# Altium PCB PCB.PcbDoc (part 2 of 11)
Units mm, origin at the board's own origin, x right, y up, seen from the top; angles counter-clockwise.
Board outline 100.46 x 70.51 mm, 10 copper layers (L1(SIG), L2(GND), L3(PWR), L4(SIG), L5(GND), L6(SIG), L7(GND), L8(SIG), L9(GND), L10(SIG)), stack 1.49 mm thick; 425 components, 324 nets, 2004 pads, 1425 vias.
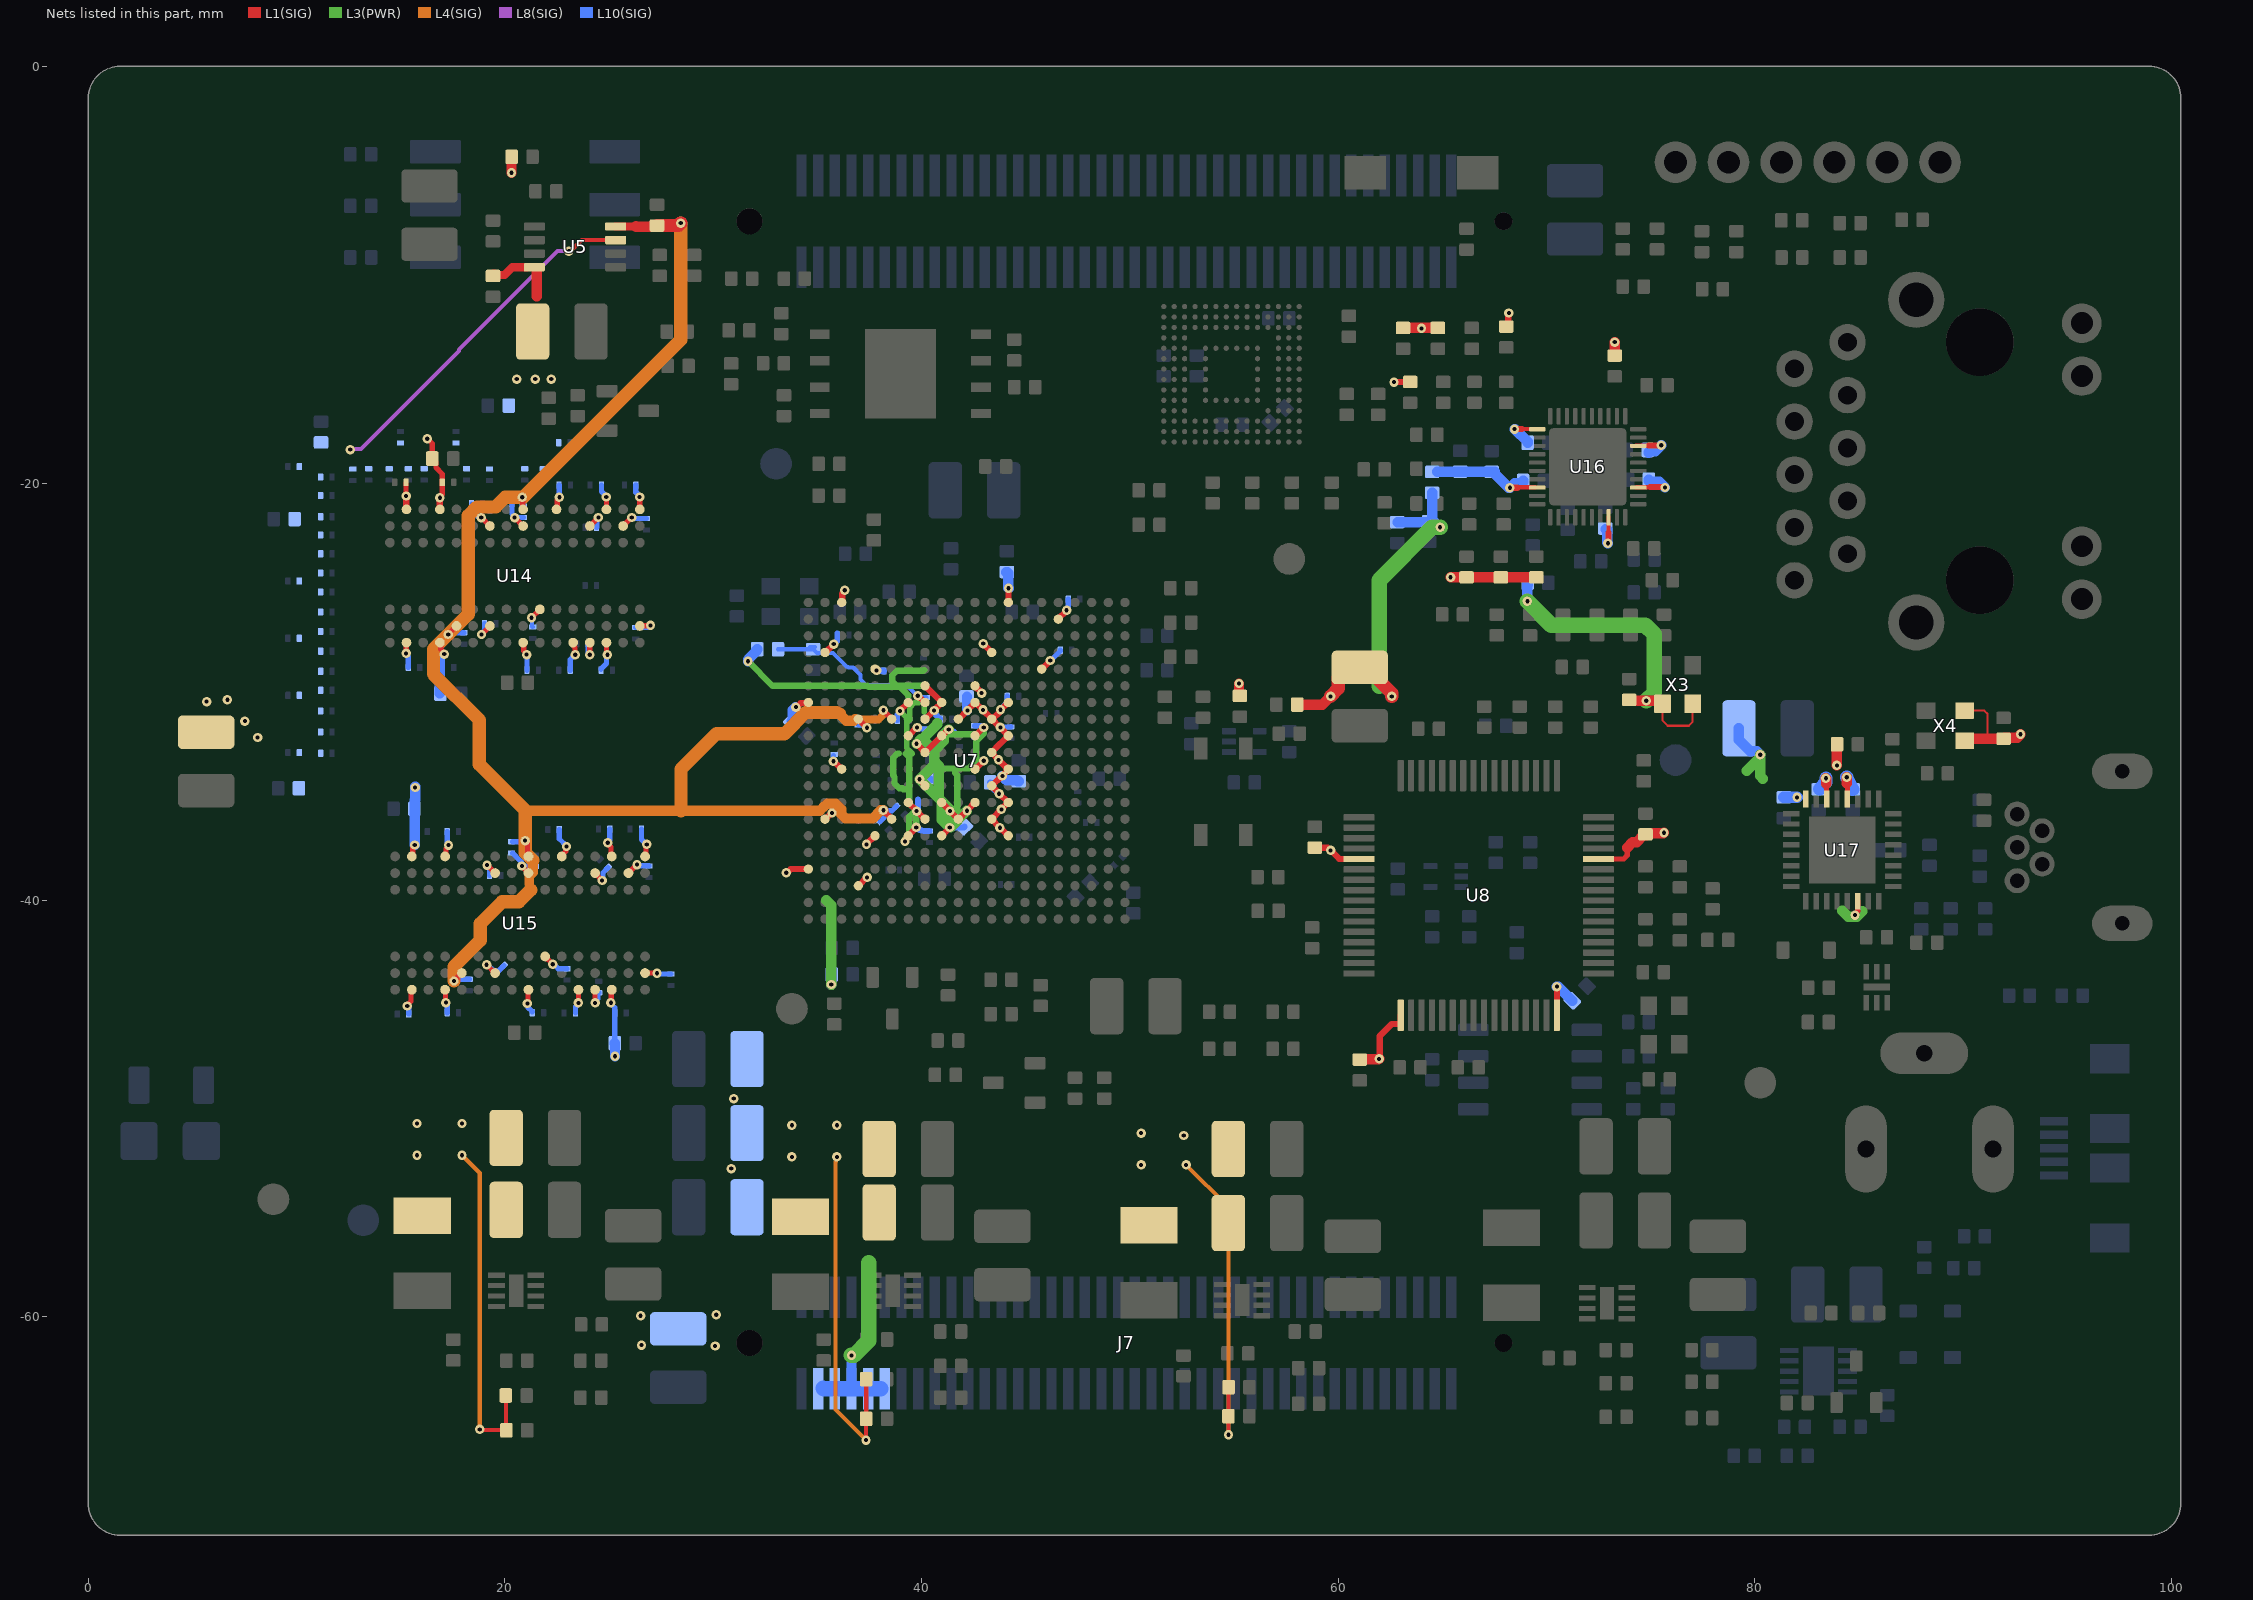
[diagram p10: the nets of this part, all layers, seen from the top]

## Footprints (in the part's own frame and the unit in brackets; to place one, negate y for a bottom-side part, rotate by r counter-clockwise, add the part's x,y. Pads: shape width x height; smd on the part's side, far side on the other; paste and mask are expansions set on the pad) (continued)
BGA400C80P20X20_1700X1700X160N [mm]
  round 0.45 smd: A1(-7.6,7.6) A2(-6.8,7.6) A3(-6,7.6) A4(-5.2,7.6) A5(-4.4,7.6) A6(-3.6,7.6) A7(-2.8,7.6) A8(-2,7.6) A9(-1.2,7.6) A10(-0.4,7.6) A11(0.4,7.6) A12(1.2,7.6) A13(2,7.6) A14(2.8,7.6) A15(3.6,7.6) A16(4.4,7.6) A17(5.2,7.6) A18(6,7.6) A19(6.8,7.6) A20(7.6,7.6) B1(-7.6,6.8) B2(-6.8,6.8) B3(-6,6.8) B4(-5.2,6.8) B5(-4.4,6.8) B6(-3.6,6.8) B7(-2.8,6.8) B8(-2,6.8) B9(-1.2,6.8) B10(-0.4,6.8) B11(0.4,6.8) B12(1.2,6.8) B13(2,6.8) B14(2.8,6.8) B15(3.6,6.8) B16(4.4,6.8) B17(5.2,6.8) B18(6,6.8) B19(6.8,6.8) B20(7.6,6.8) C1(-7.6,6) C2(-6.8,6) C3(-6,6) C4(-5.2,6) C5(-4.4,6) C6(-3.6,6) C7(-2.8,6) C8(-2,6) C9(-1.2,6) C10(-0.4,6) C11(0.4,6) C12(1.2,6) C13(2,6) C14(2.8,6) C15(3.6,6) C16(4.4,6) C17(5.2,6) C18(6,6) C19(6.8,6) C20(7.6,6) D1(-7.6,5.2) D2(-6.8,5.2) D3(-6,5.2) D4(-5.2,5.2) D5(-4.4,5.2) D6(-3.6,5.2) D7(-2.8,5.2) D8(-2,5.2) D9(-1.2,5.2) D10(-0.4,5.2) D11(0.4,5.2) D12(1.2,5.2) D13(2,5.2) D14(2.8,5.2) D15(3.6,5.2) D16(4.4,5.2) D17(5.2,5.2) D18(6,5.2) D19(6.8,5.2) D20(7.6,5.2) E1(-7.6,4.4) E2(-6.8,4.4) E3(-6,4.4) E4(-5.2,4.4) E5(-4.4,4.4) E6(-3.6,4.4) E7(-2.8,4.4) E8(-2,4.4) E9(-1.2,4.4) E10(-0.4,4.4) E11(0.4,4.4) E12(1.2,4.4) E13(2,4.4) E14(2.8,4.4) E15(3.6,4.4) E16(4.4,4.4) E17(5.2,4.4) E18(6,4.4) E19(6.8,4.4) E20(7.6,4.4) F1(-7.6,3.6) F2(-6.8,3.6) F3(-6,3.6) F4(-5.2,3.6) F5(-4.4,3.6) F6(-3.6,3.6) F7(-2.8,3.6) F8(-2,3.6) F9(-1.2,3.6) F10(-0.4,3.6) F11(0.4,3.6) F12(1.2,3.6) F13(2,3.6) F14(2.8,3.6) F15(3.6,3.6) F16(4.4,3.6) F17(5.2,3.6) F18(6,3.6) F19(6.8,3.6) F20(7.6,3.6) G1(-7.6,2.8) G2(-6.8,2.8) G3(-6,2.8) G4(-5.2,2.8) G5(-4.4,2.8) G6(-3.6,2.8) G7(-2.8,2.8) G8(-2,2.8) G9(-1.2,2.8) G10(-0.4,2.8) G11(0.4,2.8) G12(1.2,2.8) G13(2,2.8) G14(2.8,2.8) G15(3.6,2.8) G16(4.4,2.8) G17(5.2,2.8) G18(6,2.8) G19(6.8,2.8) G20(7.6,2.8) H1(-7.6,2) H2(-6.8,2) H3(-6,2) H4(-5.2,2) H5(-4.4,2) H6(-3.6,2) H7(-2.8,2) H8(-2,2) H9(-1.2,2) H10(-0.4,2) H11(0.4,2) H12(1.2,2) H13(2,2) H14(2.8,2) H15(3.6,2) H16(4.4,2) H17(5.2,2) H18(6,2) H19(6.8,2) H20(7.6,2) J1(-7.6,1.2) J2(-6.8,1.2) J3(-6,1.2) J4(-5.2,1.2) J5(-4.4,1.2) J6(-3.6,1.2) J7(-2.8,1.2) J8(-2,1.2) J9(-1.2,1.2) J10(-0.4,1.2) J11(0.4,1.2) J12(1.2,1.2) J13(2,1.2) J14(2.8,1.2) J15(3.6,1.2) J16(4.4,1.2) J17(5.2,1.2) J18(6,1.2) J19(6.8,1.2) J20(7.6,1.2) K1(-7.6,0.4) K2(-6.8,0.4) K3(-6,0.4) K4(-5.2,0.4) K5(-4.4,0.4) K6(-3.6,0.4) K7(-2.8,0.4) K8(-2,0.4) K9(-1.2,0.4) K10(-0.4,0.4) K11(0.4,0.4) K12(1.2,0.4) K13(2,0.4) K14(2.8,0.4) K15(3.6,0.4) K16(4.4,0.4) K17(5.2,0.4) K18(6,0.4) K19(6.8,0.4) K20(7.6,0.4) L1(-7.6,-0.4) L2(-6.8,-0.4) L3(-6,-0.4) L4(-5.2,-0.4) L5(-4.4,-0.4) L6(-3.6,-0.4) L7(-2.8,-0.4) L8(-2,-0.4) L9(-1.2,-0.4) L10(-0.4,-0.4) L11(0.4,-0.4) L12(1.2,-0.4) L13(2,-0.4) L14(2.8,-0.4) L15(3.6,-0.4) L16(4.4,-0.4) L17(5.2,-0.4) L18(6,-0.4) L19(6.8,-0.4) L20(7.6,-0.4) M1(-7.6,-1.2) M2(-6.8,-1.2) M3(-6,-1.2) M4(-5.2,-1.2) M5(-4.4,-1.2) M6(-3.6,-1.2) M7(-2.8,-1.2) M8(-2,-1.2) M9(-1.2,-1.2) M10(-0.4,-1.2) M11(0.4,-1.2) M12(1.2,-1.2) M13(2,-1.2) M14(2.8,-1.2) M15(3.6,-1.2) M16(4.4,-1.2) M17(5.2,-1.2) M18(6,-1.2) M19(6.8,-1.2) M20(7.6,-1.2) N1(-7.6,-2) N2(-6.8,-2) N3(-6,-2) N4(-5.2,-2) N5(-4.4,-2) N6(-3.6,-2) N7(-2.8,-2) N8(-2,-2) N9(-1.2,-2) N10(-0.4,-2) N11(0.4,-2) N12(1.2,-2) N13(2,-2) N14(2.8,-2) N15(3.6,-2) N16(4.4,-2) N17(5.2,-2) N18(6,-2) N19(6.8,-2) N20(7.6,-2) P1(-7.6,-2.8) P2(-6.8,-2.8) P3(-6,-2.8) P4(-5.2,-2.8) P5(-4.4,-2.8) P6(-3.6,-2.8) P7(-2.8,-2.8) P8(-2,-2.8) P9(-1.2,-2.8) P10(-0.4,-2.8) P11(0.4,-2.8) P12(1.2,-2.8) P13(2,-2.8) P14(2.8,-2.8) P15(3.6,-2.8) P16(4.4,-2.8) P17(5.2,-2.8) P18(6,-2.8) P19(6.8,-2.8) P20(7.6,-2.8) R1(-7.6,-3.6) R2(-6.8,-3.6) R3(-6,-3.6) R4(-5.2,-3.6) R5(-4.4,-3.6) R6(-3.6,-3.6) R7(-2.8,-3.6) R8(-2,-3.6) R9(-1.2,-3.6) R10(-0.4,-3.6) R11(0.4,-3.6) R12(1.2,-3.6) R13(2,-3.6) R14(2.8,-3.6) R15(3.6,-3.6) R16(4.4,-3.6) R17(5.2,-3.6) R18(6,-3.6) R19(6.8,-3.6) R20(7.6,-3.6) T1(-7.6,-4.4) T2(-6.8,-4.4) T3(-6,-4.4) T4(-5.2,-4.4) T5(-4.4,-4.4) T6(-3.6,-4.4) T7(-2.8,-4.4) T8(-2,-4.4) T9(-1.2,-4.4) T10(-0.4,-4.4) T11(0.4,-4.4) T12(1.2,-4.4) T13(2,-4.4) T14(2.8,-4.4) T15(3.6,-4.4) T16(4.4,-4.4) T17(5.2,-4.4) T18(6,-4.4) T19(6.8,-4.4) T20(7.6,-4.4) U1(-7.6,-5.2) U2(-6.8,-5.2) U3(-6,-5.2) U4(-5.2,-5.2) U5(-4.4,-5.2) U6(-3.6,-5.2) U7(-2.8,-5.2) U8(-2,-5.2) U9(-1.2,-5.2) U10(-0.4,-5.2) U11(0.4,-5.2) U12(1.2,-5.2) U13(2,-5.2) U14(2.8,-5.2) U15(3.6,-5.2) U16(4.4,-5.2) U17(5.2,-5.2) U18(6,-5.2) U19(6.8,-5.2) U20(7.6,-5.2) V1(-7.6,-6) V2(-6.8,-6) V3(-6,-6) V4(-5.2,-6) V5(-4.4,-6) V6(-3.6,-6) V7(-2.8,-6) V8(-2,-6) V9(-1.2,-6) V10(-0.4,-6) V11(0.4,-6) V12(1.2,-6) V13(2,-6) V14(2.8,-6) V15(3.6,-6) V16(4.4,-6) V17(5.2,-6) V18(6,-6) V19(6.8,-6) V20(7.6,-6) W1(-7.6,-6.8) W2(-6.8,-6.8) W3(-6,-6.8) W4(-5.2,-6.8) W5(-4.4,-6.8) W6(-3.6,-6.8) W7(-2.8,-6.8) W8(-2,-6.8) W9(-1.2,-6.8) W10(-0.4,-6.8) W11(0.4,-6.8) W12(1.2,-6.8) W13(2,-6.8) W14(2.8,-6.8) W15(3.6,-6.8) W16(4.4,-6.8) W17(5.2,-6.8) W18(6,-6.8) W19(6.8,-6.8) W20(7.6,-6.8) Y1(-7.6,-7.6) Y2(-6.8,-7.6) Y3(-6,-7.6) Y4(-5.2,-7.6) Y5(-4.4,-7.6) Y6(-3.6,-7.6) Y7(-2.8,-7.6) Y8(-2,-7.6) Y9(-1.2,-7.6) Y10(-0.4,-7.6) Y11(0.4,-7.6) Y12(1.2,-7.6) Y13(2,-7.6) Y14(2.8,-7.6) Y15(3.6,-7.6) Y16(4.4,-7.6) Y17(5.2,-7.6) Y18(6,-7.6) Y19(6.8,-7.6) Y20(7.6,-7.6)
  silkscreen extent -9.7,-8.5 8.5,8.5, body extent -8.5,-8.5 8.5,8.5, height 1.6
CAP_0201 [mm]
  rrect25% 0.25x0.35 smd mask+0.05: 1(-0.275,0) 2(0.275,0)
  body extent -0.32,-0.17 0.31,0.16, height 0.34
CAP_0402 [mm]
  rrect25% 0.6x0.7 smd: 1(-0.5,0) 2(0.5,0)
  body extent -0.5,-0.26 0.5,0.26, height 0.37
CAP_1206 [mm]
  rrect25% 1x1.8 smd: 1(-1.55,0) 2(1.55,0)
  body extent -1.6,-0.8 1.6,0.8, height 0.94
CAP_1210 [mm]
  rrect25% 1.6x2.7 smd: 1(-1.4,0) 2(1.4,0)
  body extent -1.6,-1.25 1.6,1.25, height 2.5
CON-SOCJ-2155 [mm]
  oval 4.2x2 hole 0.8 slot 3 at 0 deg: 1(0,6.1) 2(0,0)
  oval 2x4.2 hole 0.8 slot 3 at 90 deg: 3(4.6,3.3)
  silkscreen extent -4.75,-7 5,6.98, body extent -4.5,-7.5 4.75,6.6, height 11.11
D_0402 [mm]
  rrect25% 0.6x0.7 smd: A(-0.5,0) K(0.5,0)
  silkscreen extent 0,-0.7 1.2,0.7, body extent -0.5,-0.25 0.5,0.25, height 0.51
DFN2x2-8 [mm]
  rect 0.8x0.25 smd mask+0.15: 1(-0.945,0.75) 2(-0.945,0.25) 3(-0.945,-0.25) 4(-0.945,-0.75) 5(0.945,-0.75) 6(0.945,-0.25) 7(0.945,0.25) 8(0.945,0.75)
  rect 0.69x1.55 smd: 9(0,0)
  silkscreen extent -1.6,1.3 -1.4,1.5, body extent -1.05,-1.05 1.05,1.05, height 0.65
DFN3x3_10L [mm]
  rect 0.9x0.25 smd mask+0.15: 1(-1.395,1) 2(-1.395,0.5) 3(-1.395,0) 4(-1.395,-0.5) 5(-1.395,-1) 6(1.395,-1) 7(1.395,-0.5) 8(1.395,0) 9(1.395,0.5) 10(1.395,1)
  rect 1.49x2.35 smd: 11(0,0)
  silkscreen extent -2.3,-1.7 1.7,1.8, body extent -1.55,-1.55 1.55,1.55, height 0.8
DIGILENT_HS2 [mm]
  round 2 hole 1.1: 1(0,6.35) 2(0,3.81) 3(0,1.27) 4(0,-1.27) 5(0,-3.81) 6(0,-6.35)
  silkscreen extent -1.5,-7.93 1.5,8, body extent -1.2,-7.62 1.21,7.62, height 8.39
DTSM-3 [mm]
  rect 2x1.6 smd: 1(-2.7,0) 2(2.7,0)
  silkscreen extent -1.25,-0.75 1.25,0.75, body extent -3.6,-1.75 3.6,1.75, height 4.96
FB_0402 [mm]
  rrect25% 0.6x0.7 smd: 1(-0.5,0) 2(0.5,0)
  body extent -0.5,-0.25 0.5,0.25, height 0.51
GMSB0522132EU [mm]
  round 1.2 hole 0.7 mask+0.3: 1(-1.6,2.525) 2(-0.8,1.325) 3(0,2.525) 4(0.8,1.325) 5(1.6,2.525)
  oval 1.7x2.9 hole 0.7 slot 1.9 at 90 deg: SH(-3.65,-2.525) SH(3.65,-2.525)
  silkscreen extent -4,-4.97 4,3.6, body extent -3.95,-6.27 3.95,3.13, height 3.91
HR911130A [mm]
  round 1.75 hole 0.9: 1(5.72,-8.89) 2(4.45,-6.35) 3(3.18,-8.89) 4(1.91,-6.35) 5(0.64,-8.89) 6(-0.63,-6.35) 7(-1.9,-8.89) 8(-3.17,-6.35) 9(-4.44,-8.89) 10(-5.71,-6.35)
  round 1.9 hole 1.05: 11(6.625,4.9) 12(4.085,4.9) 13(-4.085,4.9) 14(-6.625,4.9)
  round 3.25 hole 3.25 unplated: MH(-5.715,0) MH(5.715,0)
  round 2.7 hole 1.65: SH(-7.745,-3.05) SH(7.745,-3.05)
  silkscreen extent -8.25,-10.95 8.45,10.75, body extent -7.94,-10.49 7.94,10.91, height 13.51
IND_0402 [mm]
  rrect25% 0.6x0.7 smd: 1(-0.5,0) 2(0.5,0)
  body extent -0.56,-0.26 0.56,0.26, height 0.67
LED_0402_GREEN [mm]
  rrect25% 0.6x0.7 smd: A(-0.5,0) K(0.5,0)
  silkscreen extent -0.15,-0.65 1.1,0.65, body extent -0.51,-0.25 0.51,0.25, height 0.45
LQFP-64-0.5mm [mm] "TSQFP, 64-Leads, Body 10.00x10.00mm, Pitch 0.50mm, IPC Medium Density"
  rrect25% 1.5x0.3 smd mask+0.05: 1(-5.75,3.75) 2(-5.75,3.25) 3(-5.75,2.75) 4(-5.75,2.25) 5(-5.75,1.75) 6(-5.75,1.25) 7(-5.75,0.75) 8(-5.75,0.25) 9(-5.75,-0.25) 10(-5.75,-0.75) 11(-5.75,-1.25) 12(-5.75,-1.75) 13(-5.75,-2.25) 14(-5.75,-2.75) 15(-5.75,-3.25) 16(-5.75,-3.75) 33(5.75,-3.75) 34(5.75,-3.25) 35(5.75,-2.75) 36(5.75,-2.25) 37(5.75,-1.75) 38(5.75,-1.25) 39(5.75,-0.75) 40(5.75,-0.25) 41(5.75,0.25) 42(5.75,0.75) 43(5.75,1.25) 44(5.75,1.75) 45(5.75,2.25) 46(5.75,2.75) 47(5.75,3.25) 48(5.75,3.75)
  rrect25% 0.3x1.5 smd mask+0.05: 17(-3.75,-5.75) 18(-3.25,-5.75) 19(-2.75,-5.75) 20(-2.25,-5.75) 21(-1.75,-5.75) 22(-1.25,-5.75) 23(-0.75,-5.75) 24(-0.25,-5.75) 25(0.25,-5.75) 26(0.75,-5.75) 27(1.25,-5.75) 28(1.75,-5.75) 29(2.25,-5.75) 30(2.75,-5.75) 31(3.25,-5.75) 32(3.75,-5.75) 49(3.75,5.75) 50(3.25,5.75) 51(2.75,5.75) 52(2.25,5.75) 53(1.75,5.75) 54(1.25,5.75) 55(0.75,5.75) 56(0.25,5.75) 57(-0.25,5.75) 58(-0.75,5.75) 59(-1.25,5.75) 60(-1.75,5.75) 61(-2.25,5.75) 62(-2.75,5.75) 63(-3.25,5.75) 64(-3.75,5.75)
  silkscreen extent -5.88,-4 4,4.62, body extent -6,-6 6,6, height 1.6
MICT-TW-96 [mm] "BGA, 96-Balls, Body 8x14mm, Pitch 0.8mm"
  round 0.47 smd mask-0.025: A1(-3.2,6) A2(-2.4,6) A3(-1.6,6) A7(1.6,6) A8(2.4,6) A9(3.2,6) B1(-3.2,5.2) B2(-2.4,5.2) B3(-1.6,5.2) B7(1.6,5.2) B8(2.4,5.2) B9(3.2,5.2) C1(-3.2,4.4) C2(-2.4,4.4) C3(-1.6,4.4) C7(1.6,4.4) C8(2.4,4.4) C9(3.2,4.4) D1(-3.2,3.6) D2(-2.4,3.6) D3(-1.6,3.6) D7(1.6,3.6) D8(2.4,3.6) D9(3.2,3.6) E1(-3.2,2.8) E2(-2.4,2.8) E3(-1.6,2.8) E7(1.6,2.8) E8(2.4,2.8) E9(3.2,2.8) F1(-3.2,2) F2(-2.4,2) F3(-1.6,2) F7(1.6,2) F8(2.4,2) F9(3.2,2) G1(-3.2,1.2) G2(-2.4,1.2) G3(-1.6,1.2) G7(1.6,1.2) G8(2.4,1.2) G9(3.2,1.2) H1(-3.2,0.4) H2(-2.4,0.4) H3(-1.6,0.4) H7(1.6,0.4) H8(2.4,0.4) H9(3.2,0.4) J1(-3.2,-0.4) J2(-2.4,-0.4) J3(-1.6,-0.4) J7(1.6,-0.4) J8(2.4,-0.4) J9(3.2,-0.4) K1(-3.2,-1.2) K2(-2.4,-1.2) K3(-1.6,-1.2) K7(1.6,-1.2) K8(2.4,-1.2) K9(3.2,-1.2) L1(-3.2,-2) L2(-2.4,-2) L3(-1.6,-2) L7(1.6,-2) L8(2.4,-2) L9(3.2,-2) M1(-3.2,-2.8) M2(-2.4,-2.8) M3(-1.6,-2.8) M7(1.6,-2.8) M8(2.4,-2.8) M9(3.2,-2.8) N1(-3.2,-3.6) N2(-2.4,-3.6) N3(-1.6,-3.6) N7(1.6,-3.6) N8(2.4,-3.6) N9(3.2,-3.6) P1(-3.2,-4.4) P2(-2.4,-4.4) P3(-1.6,-4.4) P7(1.6,-4.4) P8(2.4,-4.4) P9(3.2,-4.4) R1(-3.2,-5.2) R2(-2.4,-5.2) R3(-1.6,-5.2) R7(1.6,-5.2) R8(2.4,-5.2) R9(3.2,-5.2) T1(-3.2,-6) T2(-2.4,-6) T3(-1.6,-6) T7(1.6,-6) T8(2.4,-6) T9(3.2,-6)
  silkscreen extent -4.77,-7 4,7, body extent -4,-7 4,7, height 1.2
MSOP8 [mm] "TSOP, 8-Leads, Body 2.90x2.80mm, Pitch 0.65mm, IPC Medium Density"
  rrect25% 1x0.4 smd mask+0.05: 1(-1.95,0.975) 2(-1.95,0.325) 3(-1.95,-0.325) 4(-1.95,-0.975) 5(1.95,-0.975) 6(1.95,-0.325) 7(1.95,0.325) 8(1.95,0.975)
  silkscreen extent -2.08,-1.3 1.05,1.85, body extent -2,-1.5 2,1.5, height 0.9
QFN-32-5x5x0.85mm [mm]
  rect 0.8x0.26 smd mask+0.125: 1(-2.45,1.75) 2(-2.45,1.25) 3(-2.45,0.75) 4(-2.45,0.25) 5(-2.45,-0.25) 6(-2.45,-0.75) 7(-2.45,-1.25) 8(-2.45,-1.75) 17(2.45,-1.75) 18(2.45,-1.25) 19(2.45,-0.75) 20(2.45,-0.25) 21(2.45,0.25) 22(2.45,0.75) 23(2.45,1.25) 24(2.45,1.75)
  rect 0.26x0.8 smd mask+0.125: 9(-1.75,-2.45) 10(-1.25,-2.45) 11(-0.75,-2.45) 12(-0.25,-2.45) 13(0.25,-2.45) 14(0.75,-2.45) 15(1.25,-2.45) 16(1.75,-2.45) 25(1.75,2.45) 26(1.25,2.45) 27(0.75,2.45) 28(0.25,2.45) 29(-0.25,2.45) 30(-0.75,2.45) 31(-1.25,2.45) 32(-1.75,2.45)
  rect 3.2x3.2 smd: 33(0,0)
  silkscreen extent -3.47,-2.7 2.7,2.7, body extent -2.55,-2.55 2.55,2.55, height 1
QFN-40-0.4-EP [mm] "QFN 40 Pads 0.4mm Pitch Thermal Pad"
  rrect50% 0.8x0.2 smd mask+0.15: 1(-2.425,1.8) 2(-2.425,1.4) 3(-2.425,1) 4(-2.425,0.6) 5(-2.425,0.2) 6(-2.425,-0.2) 7(-2.425,-0.6) 8(-2.425,-1) 9(-2.425,-1.4) 10(-2.425,-1.8) 21(2.425,-1.8) 22(2.425,-1.4) 23(2.425,-1) 24(2.425,-0.6) 25(2.425,-0.2) 26(2.425,0.2) 27(2.425,0.6) 28(2.425,1) 29(2.425,1.4) 30(2.425,1.8)
  rrect50% 0.2x0.8 smd mask+0.15: 11(-1.8,-2.425) 12(-1.4,-2.425) 13(-1,-2.425) 14(-0.6,-2.425) 15(-0.2,-2.425) 16(0.2,-2.425) 17(0.6,-2.425) 18(1,-2.425) 19(1.4,-2.425) 20(1.8,-2.425) 31(1.8,2.425) 32(1.4,2.425) 33(1,2.425) 34(0.6,2.425) 35(0.2,2.425) 36(-0.2,2.425) 37(-0.6,2.425) 38(-1,2.425) 39(-1.4,2.425) 40(-1.8,2.425)
  rrect10% 3.7x3.7 smd mask+0.15: 41(0,0)
  silkscreen extent -3.14,-2.65 2.65,3.19, body extent -2.5,-2.5 2.5,2.5, height 0.9
RES_0201 [mm]
  rrect25% 0.25x0.35 smd mask+0.05: 1(-0.275,0) 2(0.275,0)
  body extent -0.3,-0.15 0.3,0.15, height 0.15
RES_0402 [mm]
  rrect25% 0.6x0.7 smd: 1(-0.5,0) 2(0.5,0)
  body extent -0.5,-0.25 0.5,0.25, height 0.3
RES_1206 [mm]
  rrect25% 1.8x1.84 smd: 1(-1.5,0) 2(1.5,0)
  body extent -1.6,-0.83 1.6,0.83, height 0.57
SKRPANE010 [mm]
  rect 1.05x0.65 smd: 12(-2.075,1.075) 12(2.075,1.075) 34(-2.075,-1.075) 34(2.075,-1.075)
  silkscreen extent -1.9,-1.4 1.9,1.4, body extent -2.3,-1.6 2.3,1.6, height 2.51
SOD-323 [mm]
  rrect25% 0.63x0.83 smd: A(-1.115,0) K(1.115,0)
  silkscreen extent -0.1,-0.85 1.75,0.85, body extent -1.3,-0.68 1.3,0.67, height 1.1
SOIC-8 [mm] "SOIC, 8-Leads, Body 4.91x3.90mm, Pitch 1.27mm, IPC Medium Density"
  rrect25% 1.45x0.6 smd: 1(-2.725,1.905) 2(-2.725,0.635) 3(-2.725,-0.635) 4(-2.725,-1.905) 5(2.725,-1.905) 6(2.725,-0.635) 7(2.725,0.635) 8(2.725,1.905)
  silkscreen extent -2.85,-2.3 1.6,2.88, body extent -3,-2.5 3,2.5, height 1.75
SOT-5 [mm] "SOT, 5-Leads, Body 1.60x1.60mm, Pitch 0.50mm, IPC Medium Density"
  rrect25% 0.67x0.3 smd mask+0.05: 1(-0.74,0.5) 2(-0.74,0) 3(-0.74,-0.5) 4(0.74,-0.5) 5(0.74,0.5)
  silkscreen extent -1.1,-0.5 0,1.1, body extent -0.8,-0.85 0.8,0.85, height 0.6
SRP0415 [mm]
  rect 1.75x2.75 smd: 1(-1.8,0) 2(1.8,0)
  silkscreen extent -0.5,-1.25 0.5,1.25, body extent -2.2,-2.05 2.2,2.05, height 1.55
SSM3J338R,LF-SOT23-F [mm]
  rrect25% 0.6x1 smd: D(0,1) G(-0.95,-1) S(0.95,-1)
  body extent -1.45,-1.2 1.45,1.2, height 0.91
TMLF-6-1_6X1_6 [mm]
  rect 0.75x0.25 smd mask+0.15: 1(-0.74,0.5) 2(-0.74,0) 3(-0.74,-0.5) 4(0.74,-0.5) 5(0.74,0) 6(0.74,0.5)
  rect 0.33x1.26 smd mask+0.15: 7(0,0)
  silkscreen extent -0.83,0.97 -0.47,0.97, body extent -0.83,-0.82 0.83,0.82, height 0.6
USB3100-30-A [mm]
  rect 0.4x1.35 smd mask+0.15: 1(1.3,2.063) 2(0.65,2.063) 3(0,2.063) 4(-0.65,2.063) 5(-1.3,2.063)
  rect 1.4x1.9 smd: SH(-4.3,-0.613) SH(4.3,-0.613)
  rect 1.4x1.9 smd mask+0.3: SH(-0.95,-0.613) SH(0.95,-0.613)
  silkscreen extent -4.25,0.75 4.25,2.5, body extent -4.61,-3.34 4.61,2.16, height 2.69
VFBGA153-9.0x7.5x0.8 [mm]
  round 0.25 smd mask+0.03: A1(-3.25,3.25) A2(-2.75,3.25) A3(-2.25,3.25) A4(-1.75,3.25) A5(-1.25,3.25) A6(-0.75,3.25) A7(-0.25,3.25) A8(0.25,3.25) A9(0.75,3.25) A10(1.25,3.25) A11(1.75,3.25) A12(2.25,3.25) A13(2.75,3.25) A14(3.25,3.25) B1(-3.25,2.75) B2(-2.75,2.75) B3(-2.25,2.75) B4(-1.75,2.75) B5(-1.25,2.75) B6(-0.75,2.75) B7(-0.25,2.75) B8(0.25,2.75) B9(0.75,2.75) B10(1.25,2.75) B11(1.75,2.75) B12(2.25,2.75) B13(2.75,2.75) B14(3.25,2.75) C1(-3.25,2.25) C2(-2.75,2.25) C3(-2.25,2.25) C4(-1.75,2.25) C5(-1.25,2.25) C6(-0.75,2.25) C7(-0.25,2.25) C8(0.25,2.25) C9(0.75,2.25) C10(1.25,2.25) C11(1.75,2.25) C12(2.25,2.25) C13(2.75,2.25) C14(3.25,2.25) D1(-3.25,1.75) D2(-2.75,1.75) D3(-2.25,1.75) D4(-1.75,1.75) D12(2.25,1.75) D13(2.75,1.75) D14(3.25,1.75) E1(-3.25,1.25) E2(-2.75,1.25) E3(-2.25,1.25) E5(-1.25,1.25) E6(-0.75,1.25) E7(-0.25,1.25) E8(0.25,1.25) E9(0.75,1.25) E10(1.25,1.25) E12(2.25,1.25) E13(2.75,1.25) E14(3.25,1.25) F1(-3.25,0.75) F2(-2.75,0.75) F3(-2.25,0.75) F5(-1.25,0.75) F10(1.25,0.75) F12(2.25,0.75) F13(2.75,0.75) F14(3.25,0.75) G1(-3.25,0.25) G2(-2.75,0.25) G3(-2.25,0.25) G5(-1.25,0.25) G10(1.25,0.25) G12(2.25,0.25) G13(2.75,0.25) G14(3.25,0.25) H1(-3.25,-0.25) H2(-2.75,-0.25) H3(-2.25,-0.25) H5(-1.25,-0.25) H10(1.25,-0.25) H12(2.25,-0.25) H13(2.75,-0.25) H14(3.25,-0.25) J1(-3.25,-0.75) J2(-2.75,-0.75) J3(-2.25,-0.75) J5(-1.25,-0.75) J10(1.25,-0.75) J12(2.25,-0.75) J13(2.75,-0.75) J14(3.25,-0.75) K1(-3.25,-1.25) K2(-2.75,-1.25) K3(-2.25,-1.25) K5(-1.25,-1.25) K6(-0.75,-1.25) K7(-0.25,-1.25) K8(0.25,-1.25) K9(0.75,-1.25) K10(1.25,-1.25) K12(2.25,-1.25) K13(2.75,-1.25) K14(3.25,-1.25) L1(-3.25,-1.75) L2(-2.75,-1.75) L3(-2.25,-1.75) L12(2.25,-1.75) L13(2.75,-1.75) L14(3.25,-1.75) M1(-3.25,-2.25) M2(-2.75,-2.25) M3(-2.25,-2.25) M4(-1.75,-2.25) M5(-1.25,-2.25) M6(-0.75,-2.25) M7(-0.25,-2.25) M8(0.25,-2.25) M9(0.75,-2.25) M10(1.25,-2.25) M11(1.75,-2.25) M12(2.25,-2.25) M13(2.75,-2.25) M14(3.25,-2.25) N1(-3.25,-2.75) N2(-2.75,-2.75) N3(-2.25,-2.75) N4(-1.75,-2.75) N5(-1.25,-2.75) N6(-0.75,-2.75) N7(-0.25,-2.75) N8(0.25,-2.75) N9(0.75,-2.75) N10(1.25,-2.75) N11(1.75,-2.75) N12(2.25,-2.75) N13(2.75,-2.75) N14(3.25,-2.75) P1(-3.25,-3.25) P2(-2.75,-3.25) P3(-2.25,-3.25) P4(-1.75,-3.25) P5(-1.25,-3.25) P6(-0.75,-3.25) P7(-0.25,-3.25) P8(0.25,-3.25) P9(0.75,-3.25) P10(1.25,-3.25) P11(1.75,-3.25) P12(2.25,-3.25) P13(2.75,-3.25) P14(3.25,-3.25)
  silkscreen extent -5.33,-3.75 4.5,3.77, body extent -4.5,-3.75 4.5,3.75, height 0.8
WSON-8-8X6 [mm] "8-Pad WSON 8x6-mm (Package Code E) (Winbond)"
  rect 0.95x0.45 smd: 1(-3.87,1.905) 2(-3.87,0.635) 3(-3.87,-0.635) 4(-3.87,-1.905) 5(3.87,-1.905) 6(3.87,-0.635) 7(3.87,0.635) 8(3.87,1.905)
  rect 3.4x4.3 smd paste-1.7: 9(0,0)
  silkscreen extent -4.65,-3.2 4.2,3.25, body extent -4.05,-3.05 4.05,3.05, height 0.8
XTAL_2520 [mm]
  rrect10% 0.9x0.8 smd mask+0: 1(-0.925,-0.725) 2(0.925,-0.725) 3(0.925,0.725) 4(-0.925,0.725)
  silkscreen extent -1.6,-1.33 -0.54,-0.36, body extent -1.25,-1 1.25,1, height 0.8

## Part data
C1 C3 C4 C6 C7 C10 C12 C13 C15 C18 C19 C21 C22 C26 C28 C29 C34 C41 C43 C50 C51 C59 C60 C65 C67 C80: library part CAP_1210, "Capacitor SMD 1210"
C2 C5 C8 C9 C11 C14 C16 C17 C20 C23 C24 C25 C27 C30 C33 C35 C40 C44 C49 C52 C58 C61 C64 C68 C69 C78 C79 C86 C99 C100 C101 C102 C103 C104 C105 C106 C107 C108 C109 C110 C111 C112 C121 C122 C123 C124 C129 C139 C151 C161 C197 C198 C199: library part CAP_0402, "Capacitor SMD 0402"
C31: library part CAP_1206, "Capacitor SMD 1206", Voltage=250V
C32 C36 C37 C38 C39 C42 C45 C46 C47 C48 C53 C54 C55 C56 C57 C62 C63 C66 C70 C71 C72 C73 C74 C75 C76 C77 C113 C114 C115 C116 C117 C118 C119 C120 C125 C126 C127 C128 C130 C131 C132 C133 C134 C135 C136 C137 C138 C140 C141 C142 C143 C144 C145 C146 C147 C148 C149 C150 C152 C153 C154 C155 C156 C157 C158 C159 C160 C162 C163 C164 C165 C166 C167 C168 C169 C170: library part CAP_0201, "Capacitor SMD 0201", Rating=16V
C81 C82 C83 C84 C85 C87 C88 C89 C90 C91 C92 C93 C94 C95 C96 C97 C98 C171 C172 C173 C174 C175 C176 C177 C178 C179 C180 C181 C182 C183 C184 C185 C186 C187 C188 C189 C190 C191 C192 C193 C194 C195 C196: library part CAP_0402, "Capacitor SMD 0402", package=0402
D1 D7: "Diode Schottky SMD SOD-323"
D2 D8 D11 D12 D13 D14: library part LED_0402_GREEN, "LED 0402 GREEN SMD"
D3 D4 D5 D6 D9 D10 D16 D17 D18: "Diode TVS / ESD 0402"
D15: library part D_SCHOTTKY_SOD_323, "Diode Schottky SMD SOD-323"
FB1 FB2 FB3 FB4 FB5 FB6 FB7: library part FB_0402, "Ferrite Bead SMD 0402"
J1: "DC Barrell Jack 2.1mm 30V 2.5A THT", Manufacturer=Gravitech, Manufacturer Part Number=CON-SOCJ-2155
J2: library part Digilent_HS2_Header, "Digilent HS2 6-Pin 2.54mm Pitch Header", Manufacturer="Amphenol FCI", Manufacturer Part Number=68000-406HLF
J3: "USB Connector Type Micro B 2.0 SMD Reverse Mount", Manufacturer=GCT, Manufacturer Part Number=USB3100-30-A
J4: "100/1000Base-T Magnetics Single-Port RJ45 Connector with Integrated Magnetics and LEDs", Manufacturer=Hanrun, Manufacturer Part Number=HR911130A
J5: "USB 2.0 Mini AB Receptacle Right Angle Through-Hole", Manufacturer=Amphenol, Manufacturer Part Number=GMSB0522132EU
J6 J7: "BergStak® Lite 0.80mm, Board-to-Board Connector, 80 Positions, Dual Row, Vertical Header", Manufacturer=Amphenol, Manufacturer Part Number=10144518-082802LF
L1 L2 L3 L4: library part SRP0415-2R2K, "Inductor SMD 2.2uH Bourns SRP0415-2R2K", Manufacturer=Bourns, Manufacturer Part Number=SRP0415-2R2K
L5: library part IND_0402, "Inductor SMD 0402"
Q1 Q2 Q3 Q4: "MOSFET N-Channel Vds=60V Id=300mA with ESD Protection", Manufacturer=Nexperia, Manufacturer Part Number=2N7002NXAKR
R1 R2 R3 R4 R5 R6 R7 R8 R9 R10 R11 R12 R13 R14 R15 R16 R17 R18 R19 R20 R21 R22 R23 R24 R25 R26 R27 R29 R30 R31 R32 R33 R34 R35 R36 R37 R38 R39 R40 R41 R42 R43 R44 R45 R46 R47 R48 R49 R50 R51 R52 R53 R54 R55 R56 R57 R58 R59 R60 R61 R62 R63 R64 R65 R66 R67 R68 R69 R70 R71 R72 R73 R74 R75 R76 R77 R78 R79 R80 R81 R82 R83 R84 R85 R86 R87 R88 R89 R90 R91 R92 R93 R94 R95 R96 R97 R98 R99 R100 R125 R126 R127 R128 R129 R130 R131 R132 R133 R134 R135 R136 R137 R138 R139 R140 R141 R142 R143 R144 R145 R146 R147 R148 R149 R150 R151 R152 R153 R154 R155 R156 R157 R158 R159: library part RES_0402, "Resistor SMD 0402"
R28: library part RES_1206, "Resistor SMD 1206"
R101 R102 R103 R104 R105 R106 R107 R108 R109 R110 R111 R112 R113 R114 R115 R116 R117 R118 R119 R120 R121 R122 R123 R124 R160: library part RES_0201, "Resistor SMD 0201"
SW1: "Tactile Switch SMD SPST", Manufacturer=Diptronics, Manufacturer Part Number=DTSM-3
SW2: "DIP Switches SPST 3x", Manufacturer=CTS, Manufacturer Part Number=219-3LPST
SW3: "Tactile Switch SMD SPST", Manufacturer="Alps Alpine", Manufacturer Part Number=SKRPANE010
U1 U3 U4 U6: "High Efficiency 5.5V, 3A Continuous, 1MHz Synchronous Step Down Regulator", LCSC=C178236, Manufacturer=Silergy, Manufacturer Part Number="High Efficiency 5.5V, 3A continuous, 1MHz"
U2: "18V, 5A eFuse with Programmable Current Limit and Output Voltage Clamp", Manufacturer=Littelfuse, Manufacturer Part Number=LS1205EVD33
U5: "1.0V to 5.5V, 1A 1Ch Termination Regulator for DDR-SDRAMs", Manufacturer="ROHM Semiconductor", Manufacturer Part Number=BD3539FVM-TR
U8: "Hi-Speed Dual USB UART/FIFO IC", LCSC=C27882, Manufacturer=FTDI, Distributor Link=https://www.mouser.de/ProductDetail/FTDI/FT2232HL-REEL?qs=D1%2FPMqvA100v7FHcEx164g%3D%3D, Manufacturer Part Number=FT2232HL-REEL
U9: "2K Microwire Compatible Serial EEPROM", LCSC=C6164, Manufacturer=Microchip, Distributor Link=https://www.mouser.de/ProductDetail/Microchip-Technology/93LC56BT-I-SN?qs=lQv0JY93vreW%252BBssv4v8RA%3D%3D, Manufacturer Part Number=93LC56BT-I/SN
U10: "3V 128M-BIT SERIAL FLASH MEMORY WITH DUAL/QUAD SPI & QPI & DTR WSON-8", Manufacturer=Winbond, Manufacturer Part Number=W25Q128JVEIQ
U11 U13: "Single Buffer/Driver With Open-Drain Output", LCSC=C183013, Manufacturer="Texas Instruments", Distributor Link=https://www.mouser.de/ProductDetail/Texas-Instruments/SN74LVC1G07DRLR?qs=pajgIaoyDUjwau6f5T7MtQ%3D%3D, Manufacturer Part Number=SN74LVC1G07DRLR
U12: "eMMC MLC Memory 4GB 3V3", Manufacturer="SkyHigh Memory", Manufacturer Part Number=S40FC004C1B2I00000
U14 U15: library part CMP-2000-06773-2, "Automotive DDR3L SDRAM, 4 GB, 933 MHz, 1.283 to 1.45 V, -40 to 95 degC, 96-Pin TFBGA, RoHS, Tray", Manufacturer=Micron, Max Frequency=933MHz, Max Operating Temperature=95degC, Min Operating Temperature=-40degC, Operating Supply Voltage=1.35V, Package Description="96-Ball Fine Pitch Ball Grid Array, Body 14 x 8 mm, Pitch 0.8 mm", Package Reference=TW-96, Access Time=1.07ns, Address Bus Width=15b, Contact Plating=Silver, Data Bus Width=16b, Datasheet URL=https://www.micron.com/~/media/documents/products/data-sheet/dram/ddr3/4gb_automotive_ddr3l.pdf, Datasheet Version="Rev. D, 02/2017", Density=4Gb, Manufacturer URL=http://www.micron.com/, Mount=SurfaceMount, Mounting Technology=SurfaceMount, RoHSCompliant=true
U16: "INTEGRATED 10/100/1000M ETHERNET PRECISION TRANSCEIVER", Manufacturer=Realtek, Manufacturer Part Number=RTL8211F-CG
U17: "Hi-Speed USB 2.0 ULPI Transceiver", Manufacturer=Microchip, Manufacturer Part Number=USB3320C-EZK-TR
U18: "Power Distribution Switch Resistor programmable current limit / – 0.1A to 1.1A 2.5V-5.5V", Manufacturer=Microchip, Manufacturer Part Number=MIC2099-1YMT-TR
X1 X4: "Standard Clock Oscillators XO (Standard),13MHz,Standby (Power Down),CMOS, Multi-Volt,1.6 V 3.6 V,+/-50ppm,-40 C 85 C,6mA,Surface Mount,4-SMD, No Lead,(2.50mm x 2.00mm),(0.80mm)", Manufacturer=ECS, Manufacturer Part Number=ECS-2520MV-130-BN-TR
X2 X3: library part ECS-2520MV-130-BN-TR, "Standard Clock Oscillators XO (Standard),13MHz,Standby (Power Down),CMOS, Multi-Volt,1.6 V 3.6 V,+/-50ppm,-40 C 85 C,6mA,Surface Mount,4-SMD, No Lead,(2.50mm x 2.00mm),(0.80mm)", Manufacturer=ECS, Manufacturer Part Number=ECS-2520MV-130-BN-TR

## Free pads (board coordinates)
  round 1.524 smd: 3(8.89,-54.356) 4(80.264,-48.768) 5(57.658,-23.622) 6(33.782,-45.212)
  round 1.524 smd far side: 7(13.208,-55.372) 8(76.2,-33.274) 9(33.02,-19.05)

## Via types
v1: diameter 0.45, hole 0.2, L1(SIG) to L10(SIG), tented both sides, 1194 vias
v2: diameter 0.45, hole 0.2, L1(SIG) to L10(SIG), 211 vias
v3: diameter 0.6, hole 0.25, L1(SIG) to L10(SIG), 9 vias
v4: diameter 0, hole 0.2, L1(SIG) to L10(SIG), tented both sides, 6 vias
v5: diameter 5, hole 3.2, L1(SIG) to L10(SIG), tented both sides, 4 vias
v6: diameter 0.45/0.45/0.45/0.45/0.45/0.45/0.45/0.45/0.45/0.45 (per signal layer), hole 0.2, L1(SIG) to L10(SIG), tented both sides, 1 vias

## Nets (pads, with @x,y where several pads share a name; then routed paths per layer and width w, separated by ;. In a path a pad name is that pad's centre, name@x,y a point inside that pad or via, vN(x,y) a via of type N, cw(c..) or ccw(c..) an arc to the next point about the centre after c; other vN are vias at no path point)
+0V675: C22.2 C23.2 C113.2 C114.2 C115.2 C116.2 C117.2 C118.2 C119.2 C120.2 C121.2 C122.2 C123.2 C124.2 R102.2 R103.2 R104.2 R105.2 R106.2 R107.2 R108.2 R109.2 R110.2 R111.2 R112.2 R113.2 R114.2 R115.2 R116.2 R117.2 R118.2 R119.2 R120.2 R121.2 R122.2 R123.2 R124.2 R160.2 U5.3 U5.8 | length 20.1
  L1(SIG) w0.2: U5.8@21.525,-9.665 U5.8@21.575,-9.615 ; v1@23.123,-8.885 23.693,-8.315 U5.3@25.318,-8.315
  L1(SIG) w0.4: C23.2@19.481,-9.987 19.989,-9.987 20.361,-9.615 U5.8@21.037,-9.615
  L1(SIG) w0.5: C23.2@19.431,-10.037 C23.2@19.481,-9.987 ; 21.525,-11.023 U5.8@21.525,-9.665
  L8(SIG) w0.2: v1(12.575,-18.373) 12.611,-18.337 13.1,-18.337 17.797,-13.64 17.797,-13.575 22.528,-8.845 v1(23.074,-8.845)
  other v1: 20.574,-14.99 21.463,-14.99 22.225,-14.99
+0V675_Ref: C24.2 C125.2 C126.2 C127.1 C128.2 C149.1 C150.2 U5.4 U7.H6 U7.P6 U14.H1 U14.M8 U15.H1 U15.M8 | length 89.8
  L1(SIG) w0.2: U5.4@25.318,-7.665 U5.4@25.342,-7.64
  L1(SIG) w0.254: v1(17.279,-27.247) 17.279,-27.243 17.679,-26.843 U14.M8@17.679,-26.839 ; v1(17.558,-43.884) 17.558,-43.88 17.933,-43.505 U15.M8@17.933,-43.501 ; v1(20.837,-20.659) 20.858,-20.681 20.858,-21.217 U14.H1@20.879,-21.239 ; v1(20.975,-37.142) 20.975,-37.195 21.092,-37.312 21.092,-37.859 U15.H1@21.133,-37.901 ; v1(38.17,-30.887) U7.H6@38.57,-31.287
  L1(SIG) w0.3: v1(38.17,-35.687) 38.17,-35.698 38.57,-36.098 U7.P6@38.57,-36.11
  L1(SIG) w0.381: U5.4@25.323,-7.659 26.295,-7.659
  L1(SIG) w0.508: 26.295,-7.659 26.314,-7.678 26.996,-7.678 27.012,-7.662 27.259,-7.662 C24.2@27.305,-7.616
  L1(SIG) w0.635: C24.2@27.305,-7.616 28.329,-7.616 v1(28.448,-7.497)
  L4(SIG) w0.305: 35.127,-35.715 35.317,-35.526 35.506,-35.337 ; 36.184,-35.906 36.362,-36.085
  L4(SIG) w0.381: 21.168,-39.246 21.242,-39.321 21.242,-39.51 ; 21.168,-38.828 21.242,-38.754 ; 35.433,-30.992 36.077,-30.992 ; 36.813,-31.32 37.947,-31.32 38.17,-31.097 v1(38.17,-30.887)
  L4(SIG) w0.457: 21.168,-39.246 21.168,-38.828
  L4(SIG) w0.5: 35.317,-35.526 35.479,-35.364 35.893,-35.364 36.156,-35.628 36.156,-35.879 36.184,-35.906 36.36,-36.082 37.656,-36.082 38.051,-35.687 v1(38.17,-35.687) ; 36.077,-30.992 36.117,-31.032 36.117,-31.116 36.381,-31.379 36.754,-31.379 36.813,-31.32
  L4(SIG) w0.508: 20.975,-35.715 28.452,-35.715 35.127,-35.715 ; 21.242,-38.754 21.336,-38.66 21.336,-38.082
  L4(SIG) w0.635: v1(17.558,-43.884) 17.558,-43.194 18.819,-41.933 18.819,-41.125 19.869,-40.075 20.677,-40.075 21.242,-39.51 ; 21.336,-38.082 20.975,-37.721 v1(20.975,-37.142) 20.975,-35.715 20.975,-35.691 18.772,-33.488 18.772,-31.351 16.57,-29.148 16.57,-27.956 v1(17.279,-27.247) 18.24,-26.286 18.24,-21.538 18.657,-21.121 19.558,-21.121 20.02,-20.659 20.881,-20.659 28.448,-13.092 v1(28.448,-7.497) ; 28.452,-35.715 28.452,-33.714 30.159,-32.008 33.427,-32.008 34.443,-30.992 35.433,-30.992 35.941,-30.992
  L10(SIG) w0.254: v1(17.279,-27.247) 17.332,-27.247 17.418,-27.161 C128.2@18.034,-27.161 ; v1(17.558,-43.884) 17.611,-43.884 17.698,-43.798 C150.2@18.288,-43.798 ; C149.1@20.368,-37.192 20.873,-37.192 20.922,-37.142 v1(20.975,-37.142) ; C127.1@20.884,-21.082 20.863,-21.082 20.861,-21.08 20.861,-20.683 v1(20.837,-20.659) 20.837,-20.712 v1@20.902,-20.777 ; C126.2@38.025,-36.215 38.025,-36.213 38.227,-36.01 38.227,-35.744 v1(38.17,-35.687) 38.35,-35.687 38.376,-35.712 38.575,-35.712 38.792,-35.496 C125.2@38.795,-35.496
+1V0: C2.2 C3.2 C4.2 C34.2 C35.2 C36.2 C37.2 C43.2 C44.2 C45.2 C46.2 C47.2 C63.2 C64.2 C65.2 L1.2 R2.2 U7.G7 U7.G11 U7.G13 U7.H10 U7.H12 U7.J7 U7.J13 U7.K12 U7.L13 U7.M12 U7.N7 U7.N13 U7.P8 U7.P12 U7.R7 U7.R13 | length 49.9
  L1(SIG) w0.2: v1(37.338,-65.922) 37.342,-65.918 37.342,-64.905 R2.2@37.346,-64.901 C2.2@37.346,-62.996
  L1(SIG) w0.3: v1(38.967,-30.918) 38.967,-30.915 U7.G7@39.366,-30.516 ; v1(39.21,-37.183) 39.239,-37.155 39.239,-37.081 39.359,-36.961 U7.R7@39.359,-36.91 ; U7.R7@39.37,-36.91 39.37,-36.898 39.752,-36.516 v1(39.752,-36.505) ; U7.N7@39.37,-35.321 v1@39.765,-35.716 ; U7.J7@39.37,-32.098 39.392,-32.098 39.781,-31.71 v1(39.793,-31.71) ; v1(39.765,-35.727) 39.777,-35.727 U7.P8@40.159,-36.11 ; U7.H10@41.77,-31.31 41.782,-31.31 42.195,-30.896 v1(42.207,-30.896) 42.207,-30.884 42.57,-30.522 U7.G11@42.57,-30.51 ; U7.G11@42.589,-30.516 42.941,-30.869 v1(42.953,-30.869) 42.953,-30.881 U7.H12@43.37,-31.297 ; U7.P12@43.37,-36.121 v1@43.765,-36.516 ; U7.P12@43.37,-36.11 v1(43.835,-35.644) U7.N13@44.17,-35.31 44.158,-35.31 43.741,-34.893 v1(43.729,-34.893) 43.729,-34.881 43.37,-34.522 43.37,-34.517 43.385,-34.517 43.862,-34.04 v1(43.884,-34.04) ; U7.K12@43.37,-32.91 43.37,-32.925 43.696,-33.251 v1(43.696,-33.267) ; U7.K12@43.37,-32.898 43.739,-32.529 ; v1@43.696,-33.278 43.722,-33.278 44.154,-33.71 U7.L13@44.17,-33.71 44.17,-33.732 v1@43.893,-34.008 ; 43.739,-32.517 43.751,-32.517 44.158,-32.11 U7.J13@44.17,-32.11 44.17,-32.098 43.795,-31.723 v1@43.795,-31.706 ; v1(43.765,-36.527) 43.777,-36.527 44.159,-36.91 U7.R13@44.17,-36.91 ; v1(43.789,-31.706) 43.767,-31.706 43.385,-31.325 43.385,-31.298 43.422,-31.298 43.646,-31.074 43.665,-31.074 43.763,-30.976 43.763,-30.891 v1(43.792,-30.863) 43.804,-30.863 44.157,-30.51 U7.G13@44.17,-30.51 U7.G13@44.062,-30.617
  L3(PWR) w0.254: v1(38.967,-30.918) 39.29,-31.24 39.29,-31.497 ; 39.241,-32.967 39.569,-32.967 39.29,-32.688 39.29,-31.497 ; 39.878,-30.518 39.677,-30.518 39.443,-30.752 39.443,-31.344 39.29,-31.497 ; 40.132,-30.992 40.132,-30.738 ; v1(43.789,-31.706) v1@43.826,-31.744 ; v1@43.871,-31.753 43.871,-31.709 v1@43.879,-31.7
  L3(PWR) w0.3: 38.914,-32.96 38.848,-32.96 38.643,-33.165 38.643,-34.019 38.71,-34.087 38.71,-34.405 38.929,-34.624 39.079,-34.624 39.13,-34.675 39.413,-34.675 ; v1(39.21,-37.183) 39.21,-37.08 39.413,-36.876 39.413,-35.987 39.673,-35.727 v1(39.765,-35.727) ; 39.241,-32.967 39.413,-33.139 39.413,-34.675 ; v1(39.752,-36.505) 39.752,-35.74 v1(39.765,-35.727) ; 39.413,-34.675 39.413,-35.375 v1(39.765,-35.727)
  L4(SIG) w0.2: v1(35.941,-52.328) 35.893,-52.375 35.893,-52.55 35.874,-52.57 35.874,-64.458 v1(37.338,-65.922)
  L10(SIG) w0.254: C37.2@38.841,-31.373 38.843,-31.371 38.843,-31.094 38.967,-30.969 v1(38.967,-30.918) ; v1(39.793,-31.71) 39.846,-31.71 39.92,-31.784 40.206,-31.784 C45.2@40.208,-31.786 ; v1(43.789,-31.706) 43.812,-31.683 44.279,-31.683 C36.2@44.281,-31.681 ; v1(43.792,-30.863) 43.792,-30.81 44.122,-30.48 C63.2@44.122,-30.219
  L10(SIG) w0.3: v1(39.752,-36.505) ccw(c40.188,-36.069) 40.188,-36.686 C46.2@40.386,-36.686 ; v1(39.765,-35.727) ccw(c39.595,-35.557) 39.836,-35.557 C47.2@39.836,-35.183 ; C64.2@42.164,-30.222 C64.2@42.186,-30.243 ; v1@42.186,-30.875 v1(42.207,-30.896)
  L10(SIG) w0.305: C35.2@43.308,-34.35 43.456,-34.498 43.456,-34.642 43.707,-34.893 v1(43.729,-34.893)
  L10(SIG) w0.5: v1@42.186,-30.875 C64.2@42.186,-30.243 ; v1(43.884,-34.04) 44.081,-34.236 44.57,-34.236 44.62,-34.286 C44.2@44.67,-34.286
  other v1: 30.871,-52.889 33.782,-52.328 33.782,-50.804 35.941,-50.804 30.988,-49.53
+1V0_ETH: C173.2 C174.2 C175.2 C187.2 C188.2 C189.2 L5.2 U16.3 U16.8 U16.21 U16.38 | length 12.3
  L1(SIG) w0.2: 68.832,-17.385 69.124,-17.385 69.128,-17.381 U16.21@69.453,-17.381 ; 72.98,-22.346 72.986,-22.339 U16.38@72.986,-21.62 ; U16.8@74.309,-18.181 74.636,-18.181 74.638,-18.182 74.905,-18.182 74.919,-18.168 ; U16.3@74.312,-20.181 74.636,-20.181 74.641,-20.176 74.96,-20.176
  L1(SIG) w0.3: v1(68.472,-17.385) 68.832,-17.385 ; v1(72.955,-22.864) 72.98,-22.838 72.98,-22.346 ; 74.92,-18.169 v1@75.51,-18.169 ; 74.973,-20.163 75.667,-20.163 v1(75.695,-20.191)
  L1(SIG) w0.5: v1(65.405,-24.502) 66.162,-24.502 C188.2@66.167,-24.507 L5.2@69.515,-24.507
  L10(SIG) w0.5: v1(68.472,-17.385) 68.494,-17.385 69.096,-17.988 C189.2@69.096,-18.038 ; C173.2@72.847,-22.195 72.907,-22.195 72.921,-22.209 72.921,-22.83 v1(72.955,-22.864) ; C175.2@74.922,-19.816 74.922,-19.866 74.972,-19.916 75.419,-19.916 v1(75.695,-20.191) ; C174.2@74.922,-18.531 74.922,-18.496 74.972,-18.446 75.233,-18.446 v1(75.517,-18.162)
+1V8: C11.2 C12.2 C13.2 C38.2 C39.2 C40.2 C41.2 C42.2 C48.2 C49.2 C50.2 C60.2 C61.2 C62.2 C182.2 C183.2 C192.2 C193.2 C194.2 C197.2 FB1.2 FB6.1 J7.70 J7.72 J7.74 J7.76 J7.78 L2.2 R10.2 R72.2 R73.2 R154.1 U7.A13 U7.B16 U7.D12 U7.E15 U7.F8 U7.F11 U7.G9 U7.H8 U7.J9 U7.J11 U7.K8 U7.L11 U7.M8 U7.N9 U7.N11 U7.P10 U7.R9 U17.14 U17.28 U17.30 U17.32 X4.1 X4.4 | length 109.7
  L1(SIG) w0.1: X4.1@90.079,-30.902 91.022,-30.902 91.186,-31.066 91.186,-32.135 91.059,-32.262 90.969,-32.352
  L1(SIG) w0.2: v1(54.737,-65.663) R10.2@54.737,-64.774 C11.2@54.737,-63.385 ; v1(84.42,-34.097) v1@84.42,-34.029
  L1(SIG) w0.254: 83.439,-34.421 83.448,-34.43 83.448,-35.143 U17.30@83.451,-35.146 ; U17.28@84.451,-35.146 84.453,-35.144 v1@84.453,-34.169 ; v1(84.818,-40.717) 84.818,-40.664 84.948,-40.533 84.948,-40.049 U17.14@84.951,-40.046
  L1(SIG) w0.3: v1(39.767,-32.49) 39.767,-32.498 40.17,-32.902 U7.K8@40.17,-32.903 ; v1(39.913,-34.196) 39.913,-34.225 40.164,-34.475 U7.M8@40.164,-34.51 ; U7.K8@40.17,-32.91 U7.K8@40.17,-32.903 ; U7.H8@40.17,-31.31 40.182,-31.31 40.559,-30.932 40.559,-30.846 40.645,-30.846 40.97,-30.522 U7.G9@40.97,-30.51 U7.F8@40.17,-29.71 ; U7.N9@40.967,-35.313 41.371,-35.717 v1(41.371,-35.723) ; U7.R9@40.97,-36.91 40.97,-36.907 41.359,-36.518 v1(41.359,-36.515) ; U7.J9@40.97,-32.11 40.177,-32.903 U7.K8@40.17,-32.903 ; U7.J9@40.97,-32.104 40.995,-32.104 41.291,-31.808 v1(41.31,-31.808) ; v1@41.402,-35.717 41.402,-35.748 41.763,-36.11 U7.P10@41.77,-36.11 41.777,-36.11 42.177,-35.709 v1(42.183,-35.709) ; v1@42.189,-35.691 U7.N11@42.57,-35.31 ; U7.L11@42.57,-33.71 42.581,-33.71 42.981,-33.31 v1(42.993,-33.31) ; U7.J11@42.57,-32.11 42.581,-32.11 42.981,-31.71 v1(42.993,-31.71) ; U7.F11@42.57,-29.71 42.57,-29.726 42.889,-30.045 v1(42.889,-30.061) ; v1(42.97,-27.687) 42.97,-27.698 43.37,-28.098 U7.D12@43.37,-28.11 ; U7.A13@44.176,-25.716 44.176,-25.032 v1(44.181,-25.027) ; U7.E15@45.77,-28.91 v1(46.181,-28.499) ; U7.B16@46.57,-26.498 46.97,-26.098 v1(46.97,-26.087)
  L1(SIG) w0.5: v1(55.245,-29.599) 55.245,-30.203 R72.2@55.249,-30.207 ; R73.2@58.039,-30.611 59.249,-30.611 v1(59.642,-30.217) ; v1(83.947,-33.532) 83.947,-32.524 R154.1@83.955,-32.516 ; 84.418,-34.391 84.42,-34.389 v1(84.42,-34.097) ; X4.4@90.079,-32.352 90.169,-32.262 91.059,-32.262 91.567,-32.262 ; C197.2@91.948,-32.254 91.998,-32.204 92.598,-32.204 v1(92.762,-32.039)
  L1(SIG) w0.508: v1(83.418,-34.145) 83.439,-34.165 83.439,-34.421
  L1(SIG) w0.635: v1(59.642,-30.217) 59.642,-30.205 60.008,-29.839 60.008,-29.309 60.104,-29.214 C41.2@60.579,-29.214 ; C41.2@61.849,-29.341 62.576,-30.068 v1(62.576,-30.217)
  L3(PWR) w0.3: v1(31.675,-28.532) 32.845,-29.702 37.395,-29.702 37.452,-29.76 38.968,-29.76 39.37,-30.161 39.37,-30.226 ; 40.132,-29.718 40.116,-29.702 38.807,-29.702 38.602,-29.497 38.602,-29.205 38.816,-28.991 40.097,-28.991 40.132,-28.956 ; 40.833,-33.548 40.962,-33.676 41.615,-33.676 ; 41.079,-32.039 42.663,-32.039 v1(42.993,-31.71) 42.993,-32.003 42.631,-32.365 42.631,-33.313 ; 41.656,-35.814 41.715,-35.755 41.715,-34.001 41.615,-33.9 41.615,-33.676 ; v1(42.993,-33.31) 42.635,-33.31 42.631,-33.313 ; 41.615,-33.676 42.268,-33.676 42.631,-33.313
  L3(PWR) w0.5: v1(39.767,-32.49) 39.973,-32.285 40.031,-32.285 40.767,-31.548 40.767,-31.5 ; 40.031,-32.49 40.273,-32.49 40.609,-32.826 ; 40.97,-35.253 40.97,-36.144 41.263,-36.437 41.281,-36.437 v1(41.359,-36.515) ; v1(41.31,-31.808) 41.079,-32.039 41.079,-32.356 40.609,-32.826 ; v1(42.183,-35.709) 41.378,-36.515 v1(41.359,-36.515) ; 79.629,-33.786 80.264,-33.151 v1(80.264,-33.024) 80.264,-34.04 80.391,-34.167 ; 84.201,-40.517 84.48,-40.796 84.895,-40.796 85.164,-40.527 ; 40.609,-33.323 40.609,-33.5 v1(39.913,-34.196) 40.833,-35.116 ; 40.609,-33.323 40.609,-32.826 ; 40.609,-33.323 40.833,-33.548 40.833,-35.116 ; 40.833,-35.116 41.371,-35.653 v1(41.371,-35.723) 41.371,-36.503 v1(41.359,-36.515)
  L3(PWR) w0.75: v1(36.643,-61.853) 36.754,-61.853 37.465,-61.142 37.465,-57.408 ; 61.976,-29.722 61.976,-24.642 64.516,-22.102 v1(64.897,-22.102)
  L4(SIG) w0.2: v1(52.705,-52.709) 54.737,-54.741 v1(54.737,-65.663)
  L10(SIG) w0.2: v1(41.31,-31.808) 41.358,-31.856 41.554,-31.856 41.749,-32.051 41.848,-32.051 C42.2@41.866,-32.07
  L10(SIG) w0.254: C39.2@42.545,-31.629 42.859,-31.629 42.939,-31.71 v1(42.993,-31.71) ; v1(46.181,-28.499) 46.208,-28.499 46.664,-28.043 C38.2@46.664,-27.997 ; v1(46.97,-26.087) 46.97,-26.034 47.047,-25.957 47.047,-25.549 C62.2@47.049,-25.547
  L10(SIG) w0.3: v1(39.913,-34.196) 39.932,-34.177 40.432,-34.177 C49.2@40.49,-34.236 ; v1(40.608,-30.895) 40.637,-30.924 40.637,-31.04 C48.2@40.884,-31.287 ; v1@41.36,-36.515 42.029,-36.515 C40.2@42.064,-36.48
  L10(SIG) w0.5: v1(31.675,-28.532) 31.675,-28.446 32.065,-28.056 32.065,-28.006 FB1.2@32.115,-27.956 ; J7.74@36.642,-63.459 v1@36.642,-61.854 ; C61.2@44.069,-24.253 44.119,-24.253 44.169,-24.303 44.169,-25.015 v1(44.181,-25.027) ; C183.2@62.865,-21.856 C182.2@64.524,-21.856 ; C182.2@64.516,-21.721 FB6.1@64.516,-20.443 ; C182.2@64.651,-21.856 v1(64.897,-22.102) ; C60.2@79.245,-31.754 79.245,-32.304 79.795,-32.854 80.094,-32.854 v1(80.264,-33.024)
  L10(SIG) w0.559: C194.2@81.396,-35.065 v1(82.03,-35.065)
  L10(SIG) w0.635: C193.2@83.105,-34.665 83.418,-34.352 v1(83.418,-34.145) ; v1(84.42,-34.097) C192.2@84.709,-34.683
  L10(SIG) w0.75: J7.78@35.284,-63.429 35.314,-63.459 J7.76@35.842,-63.459 J7.74@36.642,-63.459 J7.72@37.442,-63.459 J7.70@38.035,-63.459
  other v1: 30.094,-61.405 26.559,-61.361 26.515,-59.948 30.145,-59.904 50.546,-52.709 52.591,-51.298 50.546,-51.185
+1V8_ETH: C184.2 C185.2 C186.2 C190.2 FB6.2 R129.2 R130.2 R131.2 R132.2 R142.2 R143.2 U16.28 X3.1 X3.4 | length 24.9
  L1(SIG) w0.1: X3.4@75.565,-30.585 75.565,-31.372 75.819,-31.627 76.835,-31.627 77.024,-31.438 X3.1@77.024,-30.576
  L1(SIG) w0.2: 68.613,-20.206 68.637,-20.182 69.127,-20.182 69.128,-20.181 U16.28@69.456,-20.181 ; X3.4@75.424,-30.427 X3.4@75.574,-30.576
  L1(SIG) w0.3: v1(62.683,-15.133) 62.688,-15.129 63.297,-15.129 R129.2@63.306,-15.121 ; R130.2@63.119,-12.531 63.076,-12.531 R130.2@63.119,-12.488 ; R132.2@68.072,-12.466 68.17,-12.367 68.17,-11.843 v1(68.199,-11.815) ; v1(68.248,-20.206) 68.613,-20.206
  L1(SIG) w0.5: R130.2@63.119,-12.531 R131.2@64.793,-12.531 ; R143.2@73.279,-13.855 v1(73.279,-13.212) ; 74.365,-30.427 74.79,-30.427 v1(74.792,-30.429) X3.4@75.424,-30.429
  L3(PWR) w0.75: v1(69.088,-25.653) 70.236,-26.801 74.745,-26.801 75.184,-27.24 75.184,-30.037 v1(74.792,-30.429)
  L10(SIG) w0.5: FB6.2@64.763,-19.443 65.864,-19.443 C185.2@67.485,-19.443 ; C185.2@67.521,-19.427 67.471,-19.427 67.471,-19.489 68.188,-20.206 v1(68.248,-20.206) ; 68.478,-19.976 68.833,-19.976 68.883,-19.926 C186.2@68.883,-19.876 ; v1(69.088,-25.653) 69.088,-24.869 69.107,-24.85 R142.2@69.107,-24.829
  other v1: 64.005,-12.55
+1V8_FTDI: C83.2 C84.2 C85.2 C96.2 U8.12 U8.37 U8.49 U8.64 | length 12.4
  L1(SIG) w0.254: U8.12@72.506,-38.023 73.713,-38.023 73.877,-37.859 73.877,-37.478
  L1(SIG) w0.3: C84.2@58.882,-37.479 59.509,-37.479 v1(59.643,-37.613) 60.053,-38.023 U8.37@61.006,-38.023 ; v1(61.968,-47.618) 62.006,-47.58 62.006,-46.522 62.582,-45.947 63.006,-45.947 U8.49@63.006,-45.523 ; v1(70.504,-44.15) 70.506,-44.151 U8.64@70.506,-45.523
  L1(SIG) w0.5: C96.2@61.013,-47.647 61.94,-47.647 v1(61.968,-47.618) ; 73.877,-37.478 74.134,-37.221 74.33,-37.221 74.657,-36.894 C83.2@74.765,-36.894 ; C83.2@74.757,-36.844 74.807,-36.794 75.614,-36.794 v1(75.646,-36.762)
  L10(SIG) w0.5: v1(70.504,-44.15) 70.562,-44.15 C85.2@71.247,-44.835
+1V8_PLL: C32.2 C33.2 FB1.1 U7.G8 | length 8.9
  L1(SIG) w0.3: v1(39.818,-30.191) 39.835,-30.191 40.154,-30.51 U7.G8@40.17,-30.51
  L10(SIG) w0.2: FB1.1@33.115,-27.956 33.117,-27.954 34.796,-27.954 C33.2@34.798,-27.952 34.981,-28.135 35.759,-28.135 36.434,-28.81 36.467,-28.81 36.495,-28.838 36.724,-28.838 37.069,-29.183 37.069,-29.412 37.342,-29.685 39.312,-29.685 v1(39.818,-30.191) 39.886,-30.191 39.939,-30.244 40.211,-30.244 C32.2@40.236,-30.269 ; C33.2@34.643,-27.847 C33.2@34.884,-27.847
+1V35: C16.2 C18.2 C19.2 C54.2 C55.2 C56.2 C57.2 C58.2 C59.2 C127.2 C129.2 C130.2 C131.2 C132.2 C133.2 C134.2 C135.2 C136.2 C137.2 C138.2 C139.2 C140.2 C141.2 C142.2 C143.2 C144.2 C145.2 C146.2 C147.2 C148.2 C149.2 C151.2 C152.2 C153.2 C154.2 C155.2 C156.2 C157.2 C158.2 C159.2 C160.2 C161.2 C162.2 C163.2 C164.2 C165.2 C166.2 C167.2 C168.2 C169.2 C170.2 L3.2 R15.2 R20.2 R126.1 U7.A3 U7.D2 U7.E5 U7.G1 U7.H4 U7.L3 U7.P2 U7.R5 U7.U1 U7.V4 U14.A1 U14.A8 U14.B2 U14.C1 U14.C9 U14.D2 U14.D9 U14.E9 U14.F1 U14.G7 U14.H2 U14.H9 U14.K2 U14.K8 U14.N1 U14.N9 U14.R1 U14.R9 U15.A1 U15.A8 U15.B2 U15.C1 U15.C9 U15.D2 U15.D9 U15.E9 U15.F1 U15.G7 U15.H2 U15.H9 U15.K2 U15.K8 U15.N1 U15.N9 U15.R1 U15.R9 | length 85.6
  L1(SIG) w0.2: v1(18.796,-65.409) 18.816,-65.429 20.054,-65.429 C16.2@20.074,-65.45 20.058,-65.434 20.058,-63.796 R15.2@20.042,-63.78
  L1(SIG) w0.254: v1(15.259,-28.154) 15.269,-28.144 15.269,-27.648 U14.R9@15.279,-27.639 ; U14.R1@15.259,-21.219 U14.R1@15.279,-21.239 ; v1(15.259,-20.597) C136.2@15.259,-19.991 ; v1(15.316,-45.084) 15.316,-45.031 15.492,-44.855 15.492,-44.342 U15.R9@15.533,-44.301 ; U15.R1@15.533,-37.901 15.574,-37.859 15.574,-37.502 15.672,-37.404 v1(15.672,-37.351) ; v1(16.276,-17.85) 16.279,-17.85 16.518,-18.09 C139.2@16.518,-18.8 16.691,-18.973 16.691,-19.235 16.997,-19.541 C132.2@16.997,-19.943 16.997,-20.511 16.882,-20.626 v1(16.882,-20.679) ; U14.N9@16.879,-27.639 16.92,-27.68 16.92,-27.968 17.087,-28.135 v1(17.087,-28.188) ; U15.N9@17.133,-44.301 17.151,-44.318 17.151,-44.9 v1(17.168,-44.918) ; U15.N1@17.133,-37.901 17.174,-37.859 17.174,-37.533 17.297,-37.41 v1(17.297,-37.357) ; v1(18.871,-21.639) 18.875,-21.639 19.275,-22.039 U14.K2@19.279,-22.039 ; v1(18.879,-27.247) 18.879,-27.243 19.279,-26.843 U14.K8@19.279,-26.839 ; v1(19.125,-43.101) 19.129,-43.101 19.529,-43.501 U15.K8@19.533,-43.501 ; v1(19.142,-38.318) 19.146,-38.318 19.529,-38.701 U15.K2@19.533,-38.701 ; v1(20.471,-21.639) 20.475,-21.639 20.875,-22.039 U14.H2@20.879,-22.039 ; v1(20.818,-38.364) 20.818,-38.375 21.133,-38.69 U15.H2@21.133,-38.701 ; U14.H9@20.879,-27.639 20.912,-27.672 20.912,-28.032 21.042,-28.162 v1(21.042,-28.215) ; v1(21.082,-44.962) 21.108,-44.936 21.108,-44.326 U15.H9@21.133,-44.301 ; v1(21.279,-26.447) 21.279,-26.443 21.679,-26.043 U14.G7@21.679,-26.039 ; U15.G7@21.933,-42.701 21.933,-42.706 22.297,-43.07 v1(22.297,-43.075) ; U14.F1@22.479,-21.239 22.52,-21.197 22.52,-20.809 22.617,-20.712 v1(22.617,-20.659) ; U15.F1@22.733,-37.901 22.733,-37.842 22.925,-37.65 22.925,-37.463 v1(22.962,-37.425) ; U14.E9@23.279,-27.639 23.32,-27.68 23.32,-27.833 23.367,-27.88 23.367,-28.207 v1(23.378,-28.218) ; v1@23.532,-44.93 U15.E9@23.532,-44.301 ; v1@24.079,-28.216 U14.D9@24.079,-27.639 ; U14.D2@24.079,-22.039 24.082,-22.039 24.49,-21.63 v1(24.492,-21.63) ; v1@24.332,-44.93 U15.D9@24.332,-44.301 ; U15.D2@24.333,-38.701 24.333,-38.708 24.671,-39.047 v1(24.671,-39.054) ; U14.C9@24.879,-27.639 24.879,-28.122 24.922,-28.165 v1(24.922,-28.218) ; U14.C1@24.879,-21.239 v1@24.879,-20.655 ; v1(24.942,-37.247) 24.942,-37.3 25.092,-37.449 25.092,-37.859 U15.C1@25.133,-37.901 ; v1(25.089,-44.923) 25.111,-44.901 25.111,-44.323 U15.C9@25.133,-44.301 ; U14.B2@25.679,-22.039 v1@26.087,-21.63 ; U15.B2@25.933,-38.701 v1@26.341,-38.292 ; U14.A8@26.479,-26.839 26.494,-26.824 26.978,-26.824 v1(26.992,-26.809) ; U14.A1@26.479,-21.239 v1@26.479,-20.655 ; U15.A8@26.733,-43.501 v1(27.305,-43.512) ; U15.A1@26.733,-37.901 26.774,-37.859 26.774,-37.414 26.814,-37.375 v1(26.814,-37.322)
  L1(SIG) w0.3: v1(33.506,-38.683) 33.546,-38.683 33.719,-38.51 U7.U1@34.57,-38.51 ; v1(33.97,-30.732) 34.011,-30.732 34.205,-30.538 34.552,-30.538 U7.G1@34.57,-30.521 ; U7.P2@35.37,-36.11 35.39,-36.11 35.686,-35.814 v1(35.706,-35.814) ; U7.D2@35.37,-28.121 35.781,-27.71 v1(35.793,-27.71) ; v1(35.771,-33.334) 35.783,-33.334 36.148,-33.698 U7.L3@36.17,-33.698 ; U7.A3@36.17,-25.71 36.199,-25.681 36.199,-25.284 36.318,-25.165 v1(36.318,-25.124) ; U7.H4@36.97,-31.298 U7.H4@36.97,-31.31 v1@37.381,-31.72 ; U7.V4@36.981,-39.31 37.381,-38.91 v1(37.393,-38.91) ; v1(37.359,-37.321) U7.R5@37.77,-36.91 ; U7.E5@37.77,-28.91 37.782,-28.91 v1(37.849,-28.977)
  L1(SIG) w0.305: U14.R1@15.259,-21.219 v1(15.259,-20.597) ; U14.N1@16.879,-21.239 16.881,-21.237 16.881,-20.681 v1(16.882,-20.679)
  L1(SIG) w0.5: v1(20.32,-5.08) 20.32,-4.326 R20.2@20.328,-4.318
  L3(PWR) w0.5: 35.433,-40.009 35.667,-40.242 v1(35.667,-44.052)
  L4(SIG) w0.2: v1(17.941,-52.246) 18.796,-53.101 v1(18.796,-65.409)
  L10(SIG) w0.203: C131.2@18.394,-20.959 18.394,-21.162 ccw(c18.871,-21.162) v1(18.871,-21.639) ; v1(21.279,-26.447) 21.308,-26.475 21.308,-26.859 21.331,-26.883 C137.2@21.336,-26.883 ; C54.2@36.963,-31.591 36.987,-31.615 37.209,-31.615 37.315,-31.72 v1(37.382,-31.72)
  L10(SIG) w0.254: v1(15.259,-28.154) 15.259,-28.207 15.365,-28.313 15.365,-28.831 C133.2@15.367,-28.833 ; v1(15.316,-45.084) 15.316,-45.137 15.386,-45.207 15.386,-45.468 C156.2@15.388,-45.47 ; 16.883,-29.459 16.997,-29.345 C147.2@16.997,-28.833 16.999,-28.831 16.999,-28.329 17.087,-28.241 v1(17.087,-28.188) ; v1(17.168,-44.918) 17.168,-44.971 17.228,-45.031 17.228,-45.399 C168.2@17.23,-45.401 ; C157.2@17.23,-36.707 17.23,-37.236 17.297,-37.304 v1(17.297,-37.357) ; v1(18.879,-27.247) 18.879,-27.194 19.025,-27.047 19.025,-26.73 C143.2@19.027,-26.728 ; v1(19.125,-43.101) 19.178,-43.101 19.483,-43.405 19.693,-43.405 C164.2@19.955,-43.143 ; v1(19.142,-38.318) 19.142,-38.371 19.261,-38.49 19.261,-38.815 C160.2@19.263,-38.817 ; C145.2@20.341,-20.959 20.341,-21.456 20.471,-21.586 v1(20.471,-21.639) 20.508,-21.601 20.541,-21.634 20.882,-21.634 C127.2@20.884,-21.632 ; C149.2@20.368,-37.746 20.781,-38.158 20.781,-38.326 v1(20.818,-38.364) ; v1@20.818,-38.379 20.82,-38.377 21.461,-38.377 C162.2@21.463,-38.379 ; v1(21.042,-28.215) 21.059,-28.232 21.059,-28.958 C140.2@21.061,-28.96 ; v1(21.082,-44.962) 21.12,-44.999 21.12,-45.159 C155.2@21.313,-45.353 ; v1(21.279,-26.447) 21.317,-26.484 v1@21.376,-26.484 ; v1(22.297,-43.075) 22.35,-43.075 22.565,-43.29 C163.2@22.987,-43.29 ; C142.2@22.606,-20.07 22.608,-20.072 22.608,-20.65 v1(22.617,-20.659) ; C158.2@22.613,-36.609 22.613,-37.055 22.962,-37.404 v1(22.962,-37.425) ; C135.2@23.135,-28.96 23.135,-28.457 23.374,-28.218 v1(23.378,-28.218) ; C170.2@23.389,-45.414 23.391,-45.412 23.391,-45.124 23.531,-44.984 v1(23.531,-44.931) ; C138.2@24.003,-27.69 24.005,-27.692 24.005,-28.093 24.077,-28.165 v1(24.077,-28.218) ; v1(24.331,-44.931) 24.331,-44.878 24.459,-44.75 24.459,-44.448 24.461,-44.446 C153.2@24.507,-44.446 ; C141.2@24.405,-22.102 24.407,-22.1 24.407,-21.769 24.492,-21.683 v1(24.492,-21.63) ; C130.2@24.619,-28.912 24.815,-28.716 24.815,-28.709 24.884,-28.64 24.884,-28.255 v1(24.922,-28.218) ; C146.2@24.638,-20.07 24.638,-20.377 24.871,-20.61 v1(24.871,-20.648) ; v1(24.671,-39.054) 24.709,-39.017 24.709,-38.686 24.953,-38.441 C159.2@24.953,-38.438 ; v1(24.942,-37.247) 24.942,-37.193 25.038,-37.098 25.038,-36.582 C154.2@25.04,-36.58 ; v1(25.089,-44.923) 25.089,-44.976 25.277,-45.163 25.277,-45.46 25.281,-45.464 C151.2@25.281,-46.867 ; v1(26.09,-21.63) 26.143,-21.63 26.191,-21.679 C148.2@26.797,-21.679 ; C144.2@26.289,-26.907 26.842,-26.907 26.939,-26.809 v1(26.992,-26.809) ; C134.2@26.289,-20.07 26.291,-20.072 26.291,-20.414 26.471,-20.595 v1(26.471,-20.648) ; v1(26.344,-38.292) 26.397,-38.292 26.46,-38.356 26.922,-38.356 C165.2@26.924,-38.358 ; C167.2@26.564,-36.58 26.564,-37.083 26.803,-37.322 v1(26.814,-37.322) ; v1(27.305,-43.512) 27.338,-43.545 C169.2@27.973,-43.545 ; v1(35.771,-33.334) 35.774,-33.331 35.774,-33.063 C55.2@35.776,-33.061 ; v1(35.793,-27.71) ccw(c35.793,-27.538) 35.834,-27.705 35.959,-27.58 ccw(c35.793,-27.538) 35.964,-27.538 C56.2@35.964,-27.182
  L10(SIG) w0.305: v1(37.849,-28.977) 37.863,-28.99 38.187,-28.99 C57.2@38.2,-29.004
  L10(SIG) w0.5: v1(15.672,-37.351) 15.672,-35.209 15.69,-35.191 v1@15.69,-34.564 ; C129.2@16.883,-30.068 16.883,-29.459 ; C151.2@25.281,-46.867 25.286,-46.872 v1(25.286,-47.491) ; v1(35.667,-44.052) 35.667,-43.665 35.695,-43.636 R126.1@35.695,-43.565